# Altium PCB PCB1.PcbDoc
Units mil, origin at the board's own origin, x right, y up, seen from the top; angles counter-clockwise.
Board outline 4500 x 2960 mil, 2 copper layers (Top Layer, Bottom Layer), stack 60.4 mil thick; 15 components, 16 nets, 87 pads, 0 vias.
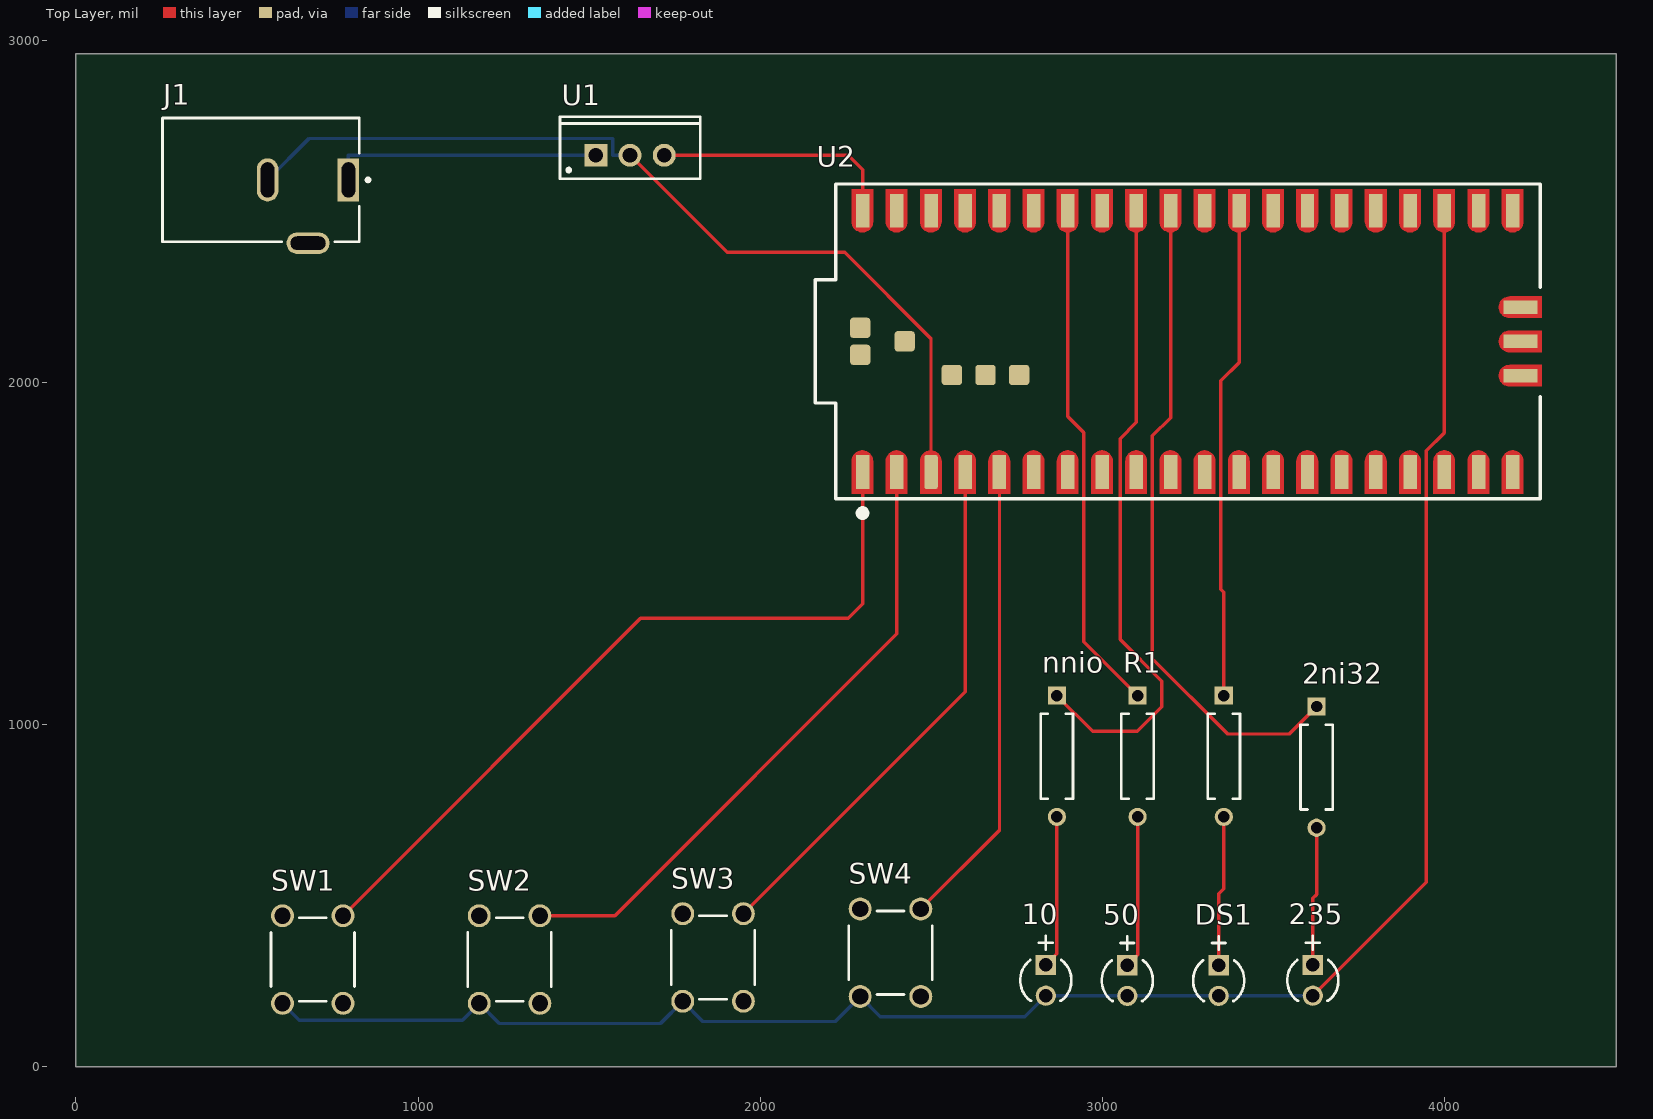
[diagram p0: Top Layer view]
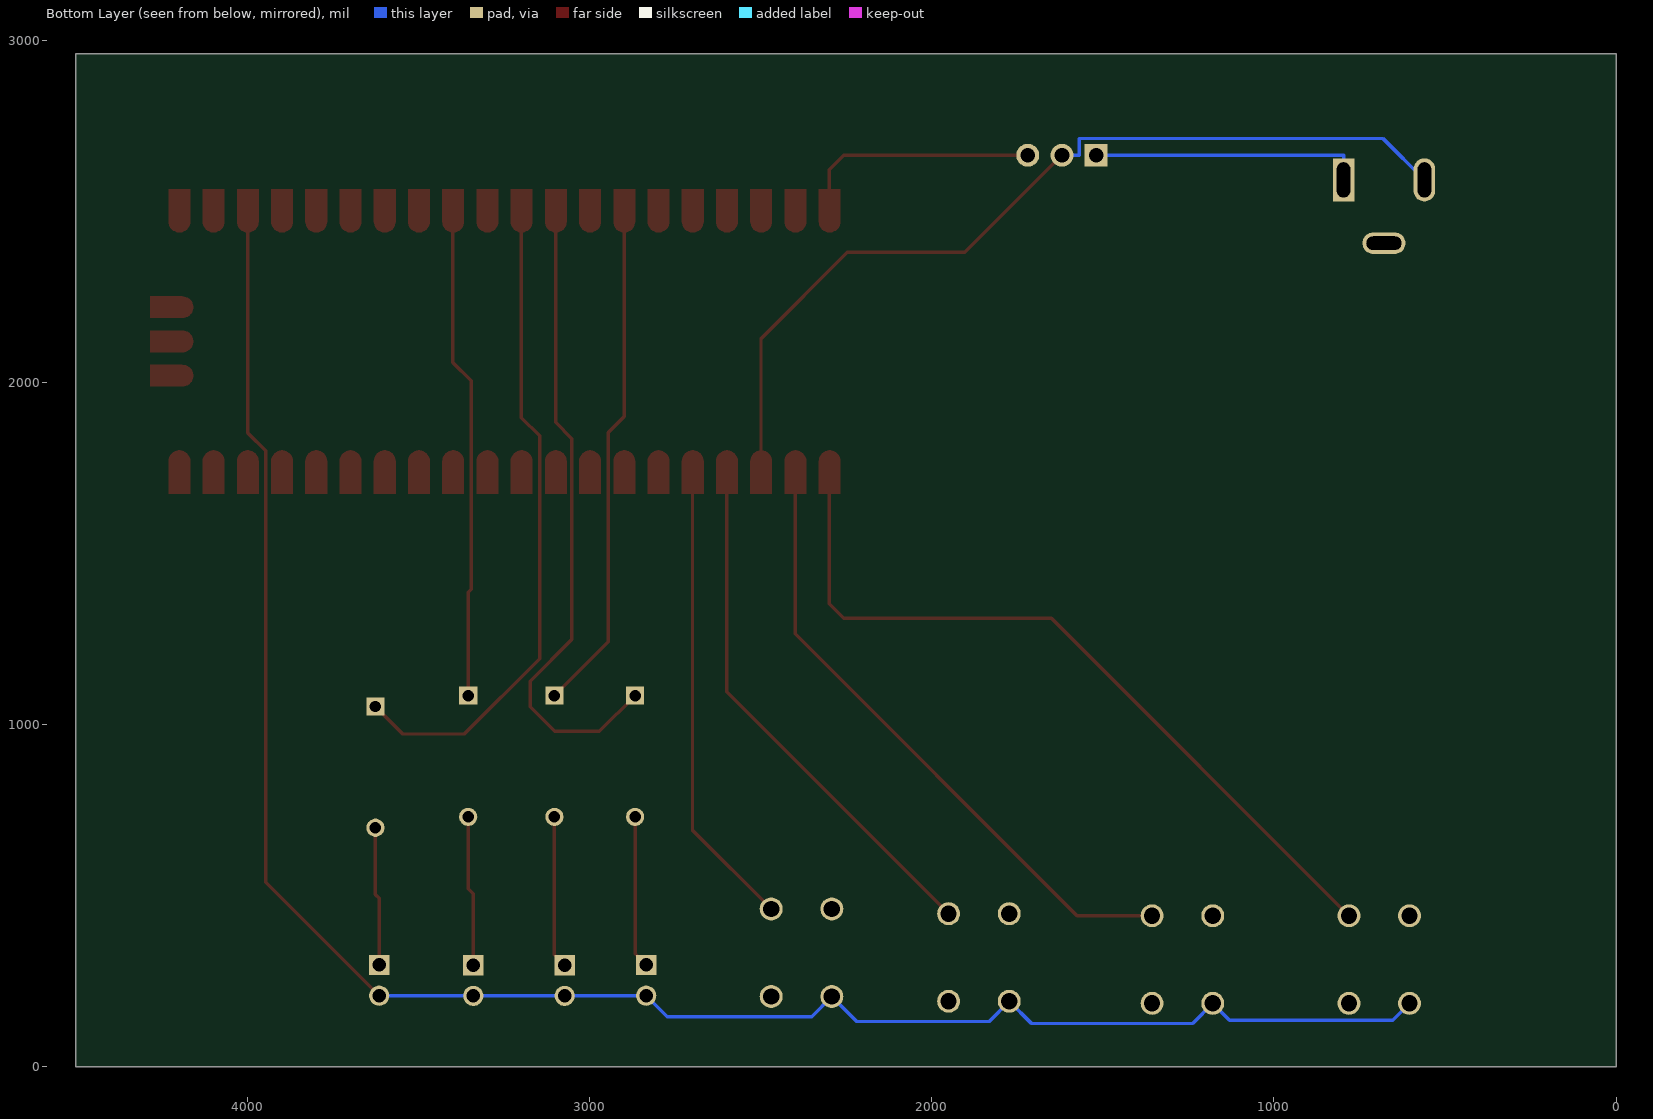
[diagram p1: Bottom Layer view, seen from below]

## Layer stack, top to bottom
Top Solder: solder mask 0.5, Solder Resist, Dk 3.3
Top Layer: signal copper 0.7
Dielectric1: core 59, FR-4, Dk 4.3
Bottom Layer: signal copper 0.7
Bottom Solder: solder mask 0.5, Solder Resist, Dk 3.3

## Board outline
0,0 4500,0 4500,2960 0,2960

## Design rules (kind name [scope] priority, off if disabled: settings)
Clearance [All] p1: gap=10 ignorepadtopadclearanceinfootprint=FALSE
DiffPairsRouting [All] p1: maxlimit=10 minlimit=10 mostfreqgap=10 toplayer_minwidth=10 toplayer_maxwidth=10 toplayer_prefwidth=10 bottomlayer_minwidth=10 bottomlayer_maxwidth=10 bottomlayer_prefwidth=10 maxuncoupledlength=500
HoleSize [All] p1: absolutevalues=TRUE maxlimit=300 minlimit=10 maxpercent=80.000 minpercent=20.000
MinimumAnnularRing [All] p1: minimumring=10
PasteMaskExpansion [All] p1: expansion=10
PlaneClearance [All] p1: clearance=15
PlaneConnect [All] p1: pad.planeconnectstyle=Relief pad.reliefexpansion=20 pad.reliefentries=4 pad.reliefconductorwidth=10 pad.reliefairgap=10 via.planeconnectstyle=Direct via.reliefexpansion=20 via.reliefentries=4 via.reliefconductorwidth=10 via.reliefairgap=10
PolygonConnect [All] p1: thpad.connectstyle=Relief thpad.reliefconductorwidth=10 thpad.reliefentries=4 thpad.polygonreliefangle="90 Angle" thpad.airgapwidth=10 smdpad.connectstyle=Relief smdpad.reliefconductorwidth=10 smdpad.reliefentries=4 smdpad.polygonreliefangle="90 Angle" smdpad.airgapwidth=10 via.connectstyle=Direct via.reliefconductorwidth=10 via.reliefentries=4 via.polygonreliefangle="90 Angle" via.airgapwidth=10
RoomDefinition JacobSimonSays [InComponentClass('JacobSimonSays')] p1: confinementstyle=ConfineIn formatcopy=TRUE lockcomponents=FALSE outline -7464,-4427 -5464,-4427 -5464,-3427 -7464,-3427
RoutingVias [All] p1: holewidth=10 width=20 viastyle="Through Hole" minholewidth=10 minwidth=20 maxholewidth=10 maxwidth=20
SMDNeckDown [All] p1: percent=100.000
SilkToSolderMaskClearance SilkscreenOverComponentPads [IsPad] p1: minsilkscreentomaskgap=10 clearancetoexposedcopper=TRUE
SolderMaskExpansion [All] p1: expansion=10 istentingtop=FALSE
Width [All] p1: maxlimit=10 minlimit=10 preferedwidth=10
24 further rules are at their usual default settings.

## Components (designator, comment, footprint, x,y, rotation, side; value= is the part's Value field where it differs from the comment)
2ni32 "MFR-25FBF52-100R" RESA60-630X240 3625.06,876.17 r270 top value=100
10 "304090040" LED-2P-2.28-3MM 2833.82,253.2 r270 top
50 "304090040" LED-2P-2.28-3MM 3072,252.58 r270 top
235 "304090040" LED-2P-2.28-3MM 3613.98,253.2 r270 top
DS1 "304090040" LED-2P-2.28-3MM 3338.99,252.58 r270 top
J1 "PJ-102A" FP-PJ-102A-MFG 540.31,2592 r90 top
nnio "MFR-25FBF52-100R" RESA60-630X240 2866.28,908 r270 top value=100
R1 "MFR-25FBF52-100R" RESA60-630X240 3101.93,908 r270 top value=100
SW1 "TS-1109" BEST-TS-1109_V 692,314 r270 top
SW2 "TS-1109" BEST-TS-1109_V 1267,314 r270 top
SW3 "TS-1109" BEST-TS-1109_V 1861.58,319.95 r270 top
SW4 "TS-1109" BEST-TS-1109_V 2380,334 r270 top
U1 "L7805CV" TO220 1619,2664 r0 top
U2 "I" RPI-PICO-MOD 3259.63,2120.03 r90 top
? "MFR-25FBF52-100R" RESA60-630X240 3354,908 r270 top value=100

## Footprints (in the part's own frame and the unit in brackets; to place one, negate y for a bottom-side part, rotate by r counter-clockwise, add the part's x,y. Pads: shape width x height; smd on the part's side, far side on the other; paste and mask are expansions set on the pad)
BEST-TS-1109_V [mm] "THD, 4-Leads, Body 6.2x6.2mm"
  round 1.7 hole 1.2: 1(-3.25,2.25) 2(3.25,2.25) 3(-3.25,-2.25) 4(3.25,-2.25)
  silkscreen extent -3.1,-3.1 3.1,3.1
FP-PJ-102A-MFG [mm]
  rect 3.2x1.6 hole 1 slot 2.6 at 0 deg paste-2539.97 mask+0: 1(0,-6.5)
  rrect100% 3.2x1.6 hole 1 slot 2.6 at 0 deg paste-2539.97 mask+0: 2(0,-0.5)
  rrect100% 1.6x3.2 hole 2.6 slot 1 at 0 deg paste-2539.97 mask+0: 3(-4.7,-3.5)
  silkscreen extent -4.6,-8.08 4.6,7.3, body extent -5.6,-7.4 4.7,7.4, height 0.25
LED-2P-2.28-3MM [mm] "LED, 2-Leads, Dia 3mm, Pitch 2.28mm"
  rect 1.5x1.5 hole 1: 1(-1.14,0)
  round 1.5 hole 1: 2(1.14,0)
  silkscreen extent -3.29,-1.9 1.52,1.9, body extent -1.9,-1.91 1.52,1.91, height 5.3
RESA60-630X240 [mm] "Axial Resistor, 2-Leads, Dia 2.4mm, Body Length 6.3mm"
  rect 1.35x1.35 hole 0.85: 1(-4.5,0)
  round 1.35 hole 0.85: 2(4.5,0)
  silkscreen extent -3.15,-1.2 3.15,1.2, body extent -4.77,-1.19 4.77,1.2, height 2.4
RPI-PICO-MOD [mm] "RASPBERRY PI PICO RP2040 BOARD"
  rect 2.5x1 smd mask+0.102: 1(-9.69,24.415) 2(-9.69,21.875) 4(-9.69,16.795) 5(-9.69,14.255) 6(-9.69,11.715) 7(-9.69,9.175) 8(-9.69,6.635) 9(-9.69,4.095) 10(-9.69,1.555) 11(-9.69,-0.985) 12(-9.69,-3.525) 13(-9.69,-6.065) 14(-9.69,-8.605) 15(-9.69,-11.145) 16(-9.69,-13.685) 17(-9.69,-16.225) 18(-9.69,-18.765) 19(-9.69,-21.305) 20(-9.69,-23.845)
  rrect25% 2.5x1 smd mask+0.102: 3(-9.69,19.335)
  rect 2.5x1 smd: 21(9.69,-23.845) 22(9.69,-21.305) 23(9.69,-18.765) 24(9.69,-16.225) 25(9.69,-13.685) 26(9.69,-11.145) 27(9.69,-8.605) 28(9.69,-6.065) 29(9.69,-3.525) 30(9.69,-0.985) 31(9.69,1.555) 32(9.69,4.095) 33(9.69,6.635) 34(9.69,9.175) 35(9.69,11.715) 36(9.69,14.255) 37(9.69,16.795) 38(9.69,19.335) 39(9.69,21.875) 40(9.69,24.415)
  rect 1x2.5 smd: 41(-2.54,-24.415) 42(0,-24.415) 43(2.54,-24.415)
  rrect30% 1.5x1.5 smd: 44(0.01,21.292) 45(1.01,24.592) 46(-0.99,24.592) 47(-2.49,17.792) 48(-2.49,15.292) 49(-2.49,12.792)
  Top Layer region: -11.292,13.471 -11.292,15.071 -8.892,15.071 -8.892,15.071 -8.545,14.992 -8.267,14.77 -8.112,14.449 -8.112,14.093 -8.267,13.772 -8.545,13.55 -8.892,13.471 -8.892,13.471
  Top Layer region: 11.292,-19.549 11.292,-17.949 8.892,-17.949 8.892,-17.949 8.545,-18.028 8.267,-18.25 8.112,-18.571 8.112,-18.927 8.267,-19.248 8.545,-19.47 8.892,-19.549 8.892,-19.549
  Top Layer region: 11.292,-24.629 11.292,-23.029 8.892,-23.029 8.892,-23.029 8.545,-23.108 8.267,-23.33 8.112,-23.651 8.112,-24.007 8.267,-24.328 8.545,-24.55 8.892,-24.629 8.892,-24.629
  Top Layer region: 11.292,-22.089 11.292,-20.489 8.892,-20.489 8.892,-20.489 8.545,-20.568 8.267,-20.79 8.112,-21.111 8.112,-21.467 8.267,-21.788 8.545,-22.01 8.892,-22.089 8.892,-22.089
  Top Layer region: 11.292,-17.009 11.292,-15.409 8.892,-15.409 8.892,-15.409 8.545,-15.488 8.267,-15.71 8.112,-16.031 8.112,-16.387 8.267,-16.708 8.545,-16.93 8.892,-17.009 8.892,-17.009
  Top Layer region: 11.292,-14.469 11.292,-12.869 8.892,-12.869 8.892,-12.869 8.545,-12.948 8.267,-13.17 8.112,-13.491 8.112,-13.847 8.267,-14.168 8.545,-14.39 8.892,-14.469 8.892,-14.469
  Top Layer region: 11.292,-11.929 11.292,-10.329 8.892,-10.329 8.892,-10.329 8.545,-10.408 8.267,-10.63 8.112,-10.951 8.112,-11.307 8.267,-11.628 8.545,-11.85 8.892,-11.929 8.892,-11.929
  Top Layer region: 11.292,-9.389 11.292,-7.789 8.892,-7.789 8.892,-7.789 8.545,-7.868 8.267,-8.09 8.112,-8.411 8.112,-8.767 8.267,-9.088 8.545,-9.31 8.892,-9.389 8.892,-9.389
  Top Layer region: 11.292,-6.849 11.292,-5.249 8.892,-5.249 8.892,-5.249 8.545,-5.328 8.267,-5.55 8.112,-5.871 8.112,-6.227 8.267,-6.548 8.545,-6.77 8.892,-6.849 8.892,-6.849
  Top Layer region: 11.292,-4.309 11.292,-2.709 8.892,-2.709 8.892,-2.709 8.545,-2.788 8.267,-3.01 8.112,-3.331 8.112,-3.687 8.267,-4.008 8.545,-4.23 8.892,-4.309 8.892,-4.309
  Top Layer region: 11.292,-1.769 11.292,-0.169 8.892,-0.169 8.892,-0.169 8.545,-0.248 8.267,-0.47 8.112,-0.791 8.112,-1.147 8.267,-1.468 8.545,-1.69 8.892,-1.769 8.892,-1.769
  Top Layer region: 11.292,0.771 11.292,2.371 8.892,2.371 8.892,2.371 8.545,2.292 8.267,2.07 8.112,1.749 8.112,1.393 8.267,1.072 8.545,0.85 8.892,0.771 8.892,0.771
  Top Layer region: 11.292,3.311 11.292,4.911 8.892,4.911 8.892,4.911 8.545,4.832 8.267,4.61 8.112,4.289 8.112,3.933 8.267,3.612 8.545,3.39 8.892,3.311 8.892,3.311
  Top Layer region: 11.292,5.851 11.292,7.451 8.892,7.451 8.892,7.451 8.545,7.372 8.267,7.15 8.112,6.829 8.112,6.473 8.267,6.152 8.545,5.93 8.892,5.851 8.892,5.851
  Top Layer region: 11.292,8.391 11.292,9.991 8.892,9.991 8.892,9.991 8.545,9.912 8.267,9.69 8.112,9.369 8.112,9.013 8.267,8.692 8.545,8.47 8.892,8.391 8.892,8.391
  Top Layer region: 11.292,10.931 11.292,12.531 8.892,12.531 8.892,12.531 8.545,12.452 8.267,12.23 8.112,11.909 8.112,11.553 8.267,11.232 8.545,11.01 8.892,10.931 8.892,10.931
  Top Layer region: 11.292,13.471 11.292,15.071 8.892,15.071 8.892,15.071 8.545,14.992 8.267,14.77 8.112,14.449 8.112,14.093 8.267,13.772 8.545,13.55 8.892,13.471 8.892,13.471
  Top Layer region: 11.292,16.011 11.292,17.611 8.892,17.611 8.892,17.611 8.545,17.532 8.267,17.31 8.112,16.989 8.112,16.633 8.267,16.312 8.545,16.09 8.892,16.011 8.892,16.011
  Top Layer region: 11.292,18.551 11.292,20.151 8.892,20.151 8.892,20.151 8.545,20.072 8.267,19.85 8.112,19.529 8.112,19.173 8.267,18.852 8.545,18.63 8.892,18.551 8.892,18.551
  Top Layer region: 11.292,21.091 11.292,22.691 8.892,22.691 8.892,22.691 8.545,22.612 8.267,22.39 8.112,22.069 8.112,21.713 8.267,21.392 8.545,21.17 8.892,21.091 8.892,21.091
  Top Layer region: 11.292,23.631 11.292,25.231 8.892,25.231 8.892,25.231 8.545,25.152 8.267,24.93 8.112,24.609 8.112,24.253 8.267,23.932 8.545,23.71 8.892,23.631 8.892,23.631
  Top Layer region: -11.292,23.631 -11.292,25.231 -8.892,25.231 -8.892,25.231 -8.545,25.152 -8.267,24.93 -8.112,24.609 -8.112,24.253 -8.267,23.932 -8.545,23.71 -8.892,23.631 -8.892,23.631
  Top Layer region: -11.292,21.091 -11.292,22.691 -8.892,22.691 -8.892,22.691 -8.545,22.612 -8.267,22.39 -8.112,22.069 -8.112,21.713 -8.267,21.392 -8.545,21.17 -8.892,21.091 -8.892,21.091
  Top Layer region: -11.292,18.551 -11.292,20.151 -8.892,20.151 -8.892,20.151 -8.545,20.072 -8.267,19.85 -8.112,19.529 -8.112,19.173 -8.267,18.852 -8.545,18.63 -8.892,18.551 -8.892,18.551
  Top Layer region: -11.292,16.011 -11.292,17.611 -8.892,17.611 -8.892,17.611 -8.545,17.532 -8.267,17.31 -8.112,16.989 -8.112,16.633 -8.267,16.312 -8.545,16.09 -8.892,16.011 -8.892,16.011
  Top Layer region: -11.292,10.931 -11.292,12.531 -8.892,12.531 -8.892,12.531 -8.545,12.452 -8.267,12.23 -8.112,11.909 -8.112,11.553 -8.267,11.232 -8.545,11.01 -8.892,10.931 -8.892,10.931
  Top Layer region: -11.292,8.391 -11.292,9.991 -8.892,9.991 -8.892,9.991 -8.545,9.912 -8.267,9.69 -8.112,9.369 -8.112,9.013 -8.267,8.692 -8.545,8.47 -8.892,8.391 -8.892,8.391
  Top Layer region: -11.292,5.851 -11.292,7.451 -8.892,7.451 -8.892,7.451 -8.545,7.372 -8.267,7.15 -8.112,6.829 -8.112,6.473 -8.267,6.152 -8.545,5.93 -8.892,5.851 -8.892,5.851
  Top Layer region: -11.292,3.311 -11.292,4.911 -8.892,4.911 -8.892,4.911 -8.545,4.832 -8.267,4.61 -8.112,4.289 -8.112,3.933 -8.267,3.612 -8.545,3.39 -8.892,3.311 -8.892,3.311
  Top Layer region: -11.292,0.771 -11.292,2.371 -8.892,2.371 -8.892,2.371 -8.545,2.292 -8.267,2.07 -8.112,1.749 -8.112,1.393 -8.267,1.072 -8.545,0.85 -8.892,0.771 -8.892,0.771
  Top Layer region: -11.292,-1.769 -11.292,-0.169 -8.892,-0.169 -8.892,-0.169 -8.545,-0.248 -8.267,-0.47 -8.112,-0.791 -8.112,-1.147 -8.267,-1.468 -8.545,-1.69 -8.892,-1.769 -8.892,-1.769
  Top Layer region: -11.292,-4.309 -11.292,-2.709 -8.892,-2.709 -8.892,-2.709 -8.545,-2.788 -8.267,-3.01 -8.112,-3.331 -8.112,-3.687 -8.267,-4.008 -8.545,-4.23 -8.892,-4.309 -8.892,-4.309
  Top Layer region: -11.292,-6.849 -11.292,-5.249 -8.892,-5.249 -8.892,-5.249 -8.545,-5.328 -8.267,-5.55 -8.112,-5.871 -8.112,-6.227 -8.267,-6.548 -8.545,-6.77 -8.892,-6.849 -8.892,-6.849
  Top Layer region: -11.292,-9.389 -11.292,-7.789 -8.892,-7.789 -8.892,-7.789 -8.545,-7.868 -8.267,-8.09 -8.112,-8.411 -8.112,-8.767 -8.267,-9.088 -8.545,-9.31 -8.892,-9.389 -8.892,-9.389
  Top Layer region: -11.292,-11.929 -11.292,-10.329 -8.892,-10.329 -8.892,-10.329 -8.545,-10.408 -8.267,-10.63 -8.112,-10.951 -8.112,-11.307 -8.267,-11.628 -8.545,-11.85 -8.892,-11.929 -8.892,-11.929
  Top Layer region: -11.292,-14.469 -11.292,-12.869 -8.892,-12.869 -8.892,-12.869 -8.545,-12.948 -8.267,-13.17 -8.112,-13.491 -8.112,-13.847 -8.267,-14.168 -8.545,-14.39 -8.892,-14.469 -8.892,-14.469
  Top Layer region: -11.292,-17.009 -11.292,-15.409 -8.892,-15.409 -8.892,-15.409 -8.545,-15.488 -8.267,-15.71 -8.112,-16.031 -8.112,-16.387 -8.267,-16.708 -8.545,-16.93 -8.892,-17.009 -8.892,-17.009
  Top Layer region: -11.292,-19.549 -11.292,-17.949 -8.892,-17.949 -8.892,-17.949 -8.545,-18.028 -8.267,-18.25 -8.112,-18.571 -8.112,-18.927 -8.267,-19.248 -8.545,-19.47 -8.892,-19.549 -8.892,-19.549
  Top Layer region: -11.292,-22.089 -11.292,-20.489 -8.892,-20.489 -8.892,-20.489 -8.545,-20.568 -8.267,-20.79 -8.112,-21.111 -8.112,-21.467 -8.267,-21.788 -8.545,-22.01 -8.892,-22.089 -8.892,-22.089
  Top Layer region: -11.292,-24.629 -11.292,-23.029 -8.892,-23.029 -8.892,-23.029 -8.545,-23.108 -8.267,-23.33 -8.112,-23.651 -8.112,-24.007 -8.267,-24.328 -8.545,-24.55 -8.892,-24.629 -8.892,-24.629
  Top Layer region: 3.34,-25.999 1.74,-25.999 1.74,-23.599 1.74,-23.599 1.819,-23.252 2.041,-22.974 2.362,-22.819 2.718,-22.819 3.039,-22.974 3.261,-23.252 3.34,-23.599 3.34,-23.599
  Top Layer region: 0.8,-25.999 -0.8,-25.999 -0.8,-23.599 -0.8,-23.599 -0.721,-23.252 -0.499,-22.974 -0.178,-22.819 0.178,-22.819 0.499,-22.974 0.721,-23.252 0.8,-23.599 0.8,-23.599
  Top Layer region: -1.74,-25.999 -3.34,-25.999 -3.34,-23.599 -3.34,-23.599 -3.261,-23.252 -3.039,-22.974 -2.718,-22.819 -2.362,-22.819 -2.041,-22.974 -1.819,-23.252 -1.74,-23.599 -1.74,-23.599
  silkscreen extent -12.99,-25.88 11.68,27.94, body extent -10.49,-25.21 10.51,27.22, height 3.69
TO220 [mm] "TO, Thru-Hole, Vertical, Heatsink Mounted; 3 In-Line Leads; Pitch 2.54 mm"
  rect 1.7x1.7 hole 1.1: 1(-2.54,0)
  round 1.7 hole 1.1: 2(0,0) 3(2.54,0)
  silkscreen extent -5.2,-1.75 5.2,2.85, body extent -5.25,-1.8 5.25,2.9, height 19.7

## Part data
2ni32 nnio R1 ?: library part CMP-009-00046-4, "Axial Resistor, 100 Ohm, +/- 1%, 0.25 W, -55 to 155 degC, 2-Pin THD, RoHS, Bulk", Case/Package=Axial, Manufacturer=Yageo, Max Operating Temperature=155°C, Min Operating Temperature=-55°C, Package Description="2-Pin Axial Lead, Dia 2.4 mm, Body Length 6.3 mm", Package Quantity=200, Package Reference=MFR-25, Power=250mW, Tolerance=1%, Voltage Rating=250V, Composition=CarbonFilm, Datasheet URL=http://www.yageo.com/documents/recent/Yageo%20LR_MFR_2013.pdf, Datasheet Version=Apr-13, Manufacturer URL=http://www.yageo.com/, Mounting Technology=TH, Packaging=Bulk, RoHS Compliant=True
10 50 235 DS1: library part CMP-007-00006-2, "Green LED, 80 mW, 20 mA, -25 to 85 degC, 2-Pin THD", Manufacturer="Shenzhen CGX", Package Description="2-Pin Through Hole Device, Dia 3 mm, Pitch 2.28 mm", Case/Package=304090040, Datasheet URL=http://datasheet.octopart.com/304090040-Chengguangxing-datasheet-62330655.pdf, Datasheet Version="Rev. 1.0, 09/2014", Manufacturer URL=http://szcgx.com/, Mounting Technology=TH, Package Reference=304090040, RoHS Compliant=Unknown
J1: library part CMP-12637-106234071-1, "PJ-102A 2.0 x 6.5 mm, 2.5 A, Horizontal, Through Hole, Tapered Pins, Dc Power Jack Connector", Color=Black, Current Rating=2.5A, Flammability Rating="UL94 V-0", Insulation Resistance=50MΩ, Max Operating Temperature=85°C, Min Operating Temperature=-25°C, Voltage Rating=24V, Contact Gender=Male, Contact Material="Copper, Nickel, Tin", Contact Plating=Nickel, Diameter=2.1mm, Gender=Male, Height=11.2mm, Housing Color=Black, Housing Material=Thermoplastic, Inside Diameter=2mm, Lead Free="Lead Free", Lifecycle Status=Production, Mount="Through Hole", NexarPartId=106234071, Number of Conductors=2, Number of Contacts=3, Orientation=Horizontal, Outside Diameter=6.5mm, Packaging=Bulk, RoHS=Compliant, Schedule B="8536695050, 8536695050", Shielding=No, Termination="Through Hole", Voltage Rating (DC)=24V
SW1 SW2 SW3 SW4: library part CMP-011-00002-2, "Tactile Switch, SPST, 12 V, 50 mA, -20 to 80 degC, 4-Pin THD", Manufacturer="Shenzhen Best", Package Description="4-Pin Through Hole Device, Body 6.2 x 6.2 mm", Case/Package=TS-1109, Datasheet URL=http://datasheet.octopart.com/TS-1109-Best-Inc.-datasheet-30458100.pdf, Datasheet Version=Dec-12, Manufacturer URL=www.best-dz.com/, Mounting Technology=TH, Package Reference=TS-1109, RoHS Compliant=Unknown
U1: library part CMP-019-00018-3, "Positive Voltage Regulator IC, 1.5 A, 5 V, 0 to 125 degC, 3-Pin TO-220, RoHS, Tube", Case/Package=TO-220, Dropout Voltage=2V, Manufacturer=STMicroelectronics, Max Input Voltage=35V, Max Operating Temperature=125°C, Max Ouput Current=1.5A, Max Supply Voltage=20V, Min Input Voltage=7V, Min Operating Temperature=0°C, Min Supply Voltage=8V, Nominal Output Voltage=5V, Package Quantity=50, Datasheet URL=https://datasheet.ciiva.com/15111/getdatasheetpartid-44136-15111027.pdf, Datasheet Version="Rev 30, 09/2012", Manufacturer URL=http://www.st.com/, Mounting Technology=TH, Output Current=1.5A, Output Voltage=5V, Outputs=1, Packaging=Rail/Tube, Pins=3, RoHS Compliant=True
U2: library part RPI-PICO-MOD, "RASPBERRY PI PICO RP2040 BOARD", Manufacturer="Raspberry Pi Foundation", Manufacturer Part No=SC0915, Supplier Part No=2648-SC0915CT-ND, Mounting Technology=SMT, Supplier=DigiKey, Supplier Link=https://www.digikey.com/en/products/detail/raspberry-pi/SC0915/13684020

## Nets (pads, with @x,y where several pads share a name; then routed paths per layer and width w, separated by ;. In a path a pad name is that pad's centre, name@x,y a point inside that pad or via, vN(x,y) a via of type N, cw(c..) or ccw(c..) an arc to the next point about the centre after c; other vN are vias at no path point)
Net2ni32_1: 2ni32.1 U2.31 | length 1935.1
  Top Layer w10: U2.31 3198.41,1897.59 3145,1844.18 3145,1193 3365,973 3544.73,973 2ni32.1
Net2ni32_2: 2ni32.2 235.1 | length 405.5
  Top Layer w10: 235.1 3613.98,493 3625.06,504.07 2ni32.2
Net10_1: 10.1 nnio.2 | length 446.2
  Top Layer w10: 10.1 2866.29,330.55 nnio.2
Net10_2: 10.2 50.2 235.2 DS1.2 SW1.4 SW2.4 SW3.4 SW4.4 U2.23 | length 5660.1
  Top Layer w10: 235.2 3946,540.33 3946,1800 3998.41,1852.41 U2.23
  Bottom Layer w10: SW1.4 652.47,137 1129.37,137 SW2.4 1237.47,127 1708,127 SW3.4 1832,133 2218.37,133 SW4.4 2350.47,147 2772.5,147 10.2 2952,208.32 2952.61,207.7 50.2 DS1.2 3476,207.7 3476.61,208.32 235.2
Net50_1: 50.1 R1.2 | length 445.8
  Top Layer w10: 50.1 3101.93,327.39 R1.2
Net_1: ?.1 U2.29 | length 1442.2
  Top Layer w10: ?.1 3354,1387 3345,1396 3345,2005 3398.41,2058.41 U2.29
Net_2: ?.2 DS1.1 | length 439.6
  Top Layer w10: DS1.1 3338.99,506 3354,521.01 ?.2
NetJ1_1: J1.1 U1.1 | length 794.8
  Bottom Layer w10: J1.1 796.22,2664 U1.1
NetJ1_2: J1.2 U1.2 U2.3 | length 2648.8
  Top Layer w10: U1.2 1903,2380 2246,2380 2498.41,2127.59 U2.3
  Bottom Layer w10: J1.2 681,2713 1568,2713 1568,2664 U1.2
Netnnio_1: nnio.1 U2.32 | length 1898.4
  Top Layer w10: nnio.1 2970.45,981 3101,981 3173,1053 3173,1127 3051,1249 3051,1836 3098.41,1883.41 U2.32
NetR1_1: R1.1 U2.34 | length 1500.7
  Top Layer w10: U2.34 2898.41,1900.59 2945,1854 2945,1242.09 R1.1
NetSW1_1: SW1.1 U2.1 | length 2280.5
  Top Layer w10: SW1.1 1649.63,1311 2256,1311 2298.41,1353.41 U2.1
NetSW2_1: SW2.1 U2.2 | length 1857
  Top Layer w10: SW2.1 1574.95,441.95 2398.41,1265.41 U2.2
NetSW3_1: SW3.1 U2.4 | length 1559.1
  Top Layer w10: SW3.1 2598.41,1096.15 U2.4
NetSW4_1: SW4.1 U2.5 | length 1371.8
  Top Layer w10: SW4.1 2698.41,691.78 U2.5
NetU1_3: U1.3 U2.40 | length 717
  Top Layer w10: U1.3 2256,2664 2298.41,2621.59 U2.40
pads on no net: J1.3 SW1.2 SW1.3 SW2.2 SW2.3 SW3.2 SW3.3 SW4.2 SW4.3 U2.6 U2.7 U2.8 U2.9 U2.10 U2.11 U2.12 U2.13 U2.14 U2.15 U2.16 U2.17 U2.18 U2.19 U2.20 U2.21 U2.22 U2.24 U2.25 U2.26 U2.27 U2.28 U2.30 U2.33 U2.35 U2.36 U2.37 U2.38 U2.39 U2.41 U2.42 U2.43 U2.44 U2.45 U2.46 U2.47 U2.48 U2.49